# EAGLE board EduBall_V1.1 (EAGLE 7.5.0)

No outline drawn. Coordinates in mm, seen from the top.
Copper layers (1*16): Top 0.035mm / dielectric 1.5mm / Bottom 0.035mm
Design rules "default": minimum track width 10mil, minimum drill 24mil, track to track 8mil, track to pad 8mil, pad to pad 8mil, via to via 8mil, smd to smd 8mil, copper to edge 40mil, drill to drill 8mil, minimum pad ring 10mil, minimum via ring 8mil, stop-mask expansion 4mil, vias tented up to drill 0mil, thermal gap 10mil
Milling: area 0,0 to 50,50

## Footprints (pad centres in the part's own frame; a part is rotated, then mirrored left to right if it is on the bottom)
0805 = smd 0.8 x 1.2: 1 -0.9,0; 2 0.9,0
LED-0805 = smd 0.889 x 1.27: + -0.889,0; - 0.889,0
USB-MINIB = smd 2.5 x 0.5: D+ 2.5,0; D- 2.5,0.8; GND 2.5,-1.6; ID 2.5,-0.8; VBUS 2.5,1.6 | smd 2.5 x 2: MTN1 -3,4.5; MTN2 2.5,4.5; MTN3 -3,-4.5; MTN4 2.5,-4.5 | hole 0.9: 0,2.2; 0,-2.2
JST-2-PTH-VERT = drill 0.7 pad 1.6: 1 -1,-0.55; 2 1,-0.55
2X3-NS = drill 1.016 pad 1.88 square: 1 -2.54,-1.27 | drill 1.016 pad 1.88 octagon: 2 -2.54,1.27; 3 0,-1.27; 4 0,1.27; 5 2.54,-1.27; 6 2.54,1.27
SOT23-5 = smd 0.55 x 1.2: 1 -0.95,-1.3; 2 0,-1.3; 3 0.95,-1.3; 4 0.95,1.3; 5 -0.95,1.3
WS2812B = smd 1.651 x 1: 1 -2.577,1.6; 2 -2.577,-1.6; 3 2.577,-1.6; 4 2.577,1.6
REED_SWITCH_PTH = drill 1.016 pad 1.88: P$1 -8.89,0; P$2 8.89,0
SW2-2.6-3.0X2.5X1.2+0.4MM = smd 1 x 1.7: 1 -1.9,0; 2 1.9,0
LGA-24 = smd 0.7 x 0.29: 1 -1.875,1.25; 2 -1.875,0.75; 3 -1.875,0.25; 4 -1.875,-0.25; 5 -1.875,-0.75; 6 -1.875,-1.25; 13 1.875,-1.25; 14 1.875,-0.75; 15 1.875,-0.25; 16 1.875,0.25; 17 1.875,0.75; 18 1.875,1.25 | smd 0.29 x 0.7: 7 -1.25,-1.875; 8 -0.75,-1.875; 9 -0.25,-1.875; 10 0.25,-1.875; 11 0.75,-1.875; 12 1.25,-1.875; 19 1.25,1.875; 20 0.75,1.875; 21 0.25,1.875; 22 -0.25,1.875; 23 -0.75,1.875; 24 -1.25,1.875
XBEE-SILK = drill 0.8 pad 1.524: 1 -11,20; 2 -11,18; 3 -11,16; 4 -11,14; 5 -11,12; 6 -11,10; 7 -11,8; 8 -11,6; 9 -11,4; 10 -11,2; 11 11,2; 12 11,4; 13 11,6; 14 11,8; 15 11,10; 16 11,12; 17 11,14; 18 11,16; 19 11,18; 20 11,20
TQFP44 = smd 1.5 x 0.5: 1 -5.8,4; 2 -5.8,3.2; 3 -5.8,2.4; 4 -5.8,1.6; 5 -5.8,0.8; 6 -5.8,0; 7 -5.8,-0.8; 8 -5.8,-1.6; 9 -5.8,-2.4; 10 -5.8,-3.2; 11 -5.8,-4; 23 5.8,-4; 24 5.8,-3.2; 25 5.8,-2.4; 26 5.8,-1.6; 27 5.8,-0.8; 28 5.8,0; 29 5.8,0.8; 30 5.8,1.6; 31 5.8,2.4; 32 5.8,3.2; 33 5.8,4 | smd 0.5 x 1.5: 12 -4,-5.8; 13 -3.2,-5.8; 14 -2.4,-5.8; 15 -1.6,-5.8; 16 -0.8,-5.8; 17 0,-5.8; 18 0.8,-5.8; 19 1.6,-5.8; 20 2.4,-5.8; 21 3.2,-5.8; 22 4,-5.8; 34 4,5.8; 35 3.2,5.8; 36 2.4,5.8; 37 1.6,5.8; 38 0.8,5.8; 39 0,5.8; 40 -0.8,5.8; 41 -1.6,5.8; 42 -2.4,5.8; 43 -3.2,5.8; 44 -4,5.8
HC49US = drill 0.7 pad 1.651: 1 -2.54,0; 2 2.54,0

## Placement (x,y rotation side)
C1  4.7uf  [0805]  6.35,19.05 270 bottom
C2  4.7uf  [0805]  8.89,10.16 150 bottom
C3  1uf  [0805]  17.02,24.51 270 bottom
C4  22pf  [0805]  30.35,34.67 90 bottom
C5  22pf  [0805]  20.57,34.67 270 bottom
C6  0.1uf  [0805]  24.26,17.02 180 bottom
C7  4.7uf  [0805]  27.18,13.97 90 bottom
C8  0.1uf  [0805]  25.15,13.97 90 bottom
C9  4.7uf  [0805]  30.48,13.97 90 bottom
C10  0.1uf  [0805]  18.59,4.31 250 top
C11  0.1uf  [0805]  30.93,4.43 295 top
C12  0.1uf  [0805]  45.97,29.97 185 top
C13  0.1uf  [0805]  4.2,30.12 175 top
C14  0.1uf  [0805]  16.73,39.49 325 bottom
C15  0.1uf  [0805]  34.08,39.82 35 bottom
C16  1uf  [0805]  30.1,25.53 270 top
C17  0.22uf  [0805]  26.8,21.08 0 top
C18  4.7uf  [0805]  23.24,21.08 180 top
D7  GREEN-0805  [LED-0805]  11.43,15.24 270 bottom
J1  USB-MINIB-5PIN  [USB-MINIB]  25.4,43.31 270 top
J2  2p-2.0  [JST-2-PTH-VERT]  6.35,13.97 300 top
J3  AVR_SPI_PRG_6NS  [2X3-NS]  43.18,13.97 55 top
MCP  MCP73831  [SOT23-5]  8.89,19.05 0 bottom
PIX1  [WS2812B]  13.29,42.98 32.5 top
PIX2  [WS2812B]  3.81,25.4 85 top
PIX3  [WS2812B]  13.97,6.35 155 top
PIX4  [WS2812B]  35.56,6.35 205 top
PIX5  [WS2812B]  46.48,25.15 275 top
PIX6  [WS2812B]  36.83,43.18 325 top
PIX7  [WS2812B]  36.83,43.18 215 bottom
PIX8  [WS2812B]  46.48,25.15 265 bottom
PIX9  [WS2812B]  35.56,6.35 335 bottom
PIX10  [WS2812B]  13.97,6.35 25 bottom
PIX11  [WS2812B]  3.81,25.42 95 bottom
PIX12  [WS2812B]  13.31,43.01 145 bottom
R1  4.7 k  [0805]  8.89,22.86 180 bottom
R2  330  [0805]  11.43,19.05 270 bottom
R3  47 k  [0805]  17.27,12.7 0 bottom
R4  1k  [0805]  17.27,14.86 0 bottom
R5  1k  [0805]  33.91,24.51 90 bottom
R6  1k  [0805]  33.91,20.45 90 bottom
R7  22  [0805]  18.54,35.56 90 bottom
R8  22  [0805]  16.76,35.56 90 bottom
R9  47k  [0805]  29.59,10.67 0 bottom
R10  47k  [0805]  29.59,16.89 0 bottom
R11  220  [0805]  33.91,28.32 270 bottom
R12  100  [0805]  17.53,32.51 180 bottom
R13  10k  [0805]  11.43,31.37 0 top
R14  4.7k  [0805]  19.43,30.61 90 top
R15  4.7k  [0805]  26.54,30.61 90 top
R16  10k  [0805]  31.37,30.61 90 top
R17  10k  [0805]  24.13,30.61 90 top
R18  10k  [0805]  28.96,30.61 90 top
R19  10k  [0805]  21.72,30.61 90 top
S1  Reed  [REED_SWITCH_PTH]  25.4,10.16 180 top
STMP  STMPS2171  [SOT23-5]  34.29,13.97 90 bottom
SW1  RESET  [SW2-2.6-3.0X2.5X1.2+0.4MM]  10.54,27.56 90 top
TLV  TLV3333P  [SOT23-5]  21.59,13.97 90 bottom
U2  LSM9DS0  [LGA-24]  25.4,25.4 0 top
U$1  XBEE-2B2  [XBEE-SILK]  25.4,16.51 0 top
U$2  ATMEGA32U4TQFP-44  [TQFP44]  25.4,25.4 180 bottom
Y1  8MHz  [HC49US]  25.4,35.56 0 top

## Library data of the parts
C1-C18 R1-R19 = SparkFun-Passives
D7 = Seeed-LED-2016; MPN: 17-215SYGC/S530-E2/TR8
J1 = SparkFun-Connectors; PROD_ID: CONN-08193
J2 J3 = SparkFun-Connectors
MCP = SparkFun-PowerIC; PROD_ID: IC-09995
PIX1-PIX12 = SparkFun-LED; PROD_ID: DIO-12503
S1 = SparkFun-Electromechanical
STMP TLV = Power_Managment
SW1 = Seeed-Switch-2016; MPN: B3U-1000P-2P-SMD
U2 U$2 = SparkFun-DigitalIC
U$1 = SparkFun-RF
Y1 = SparkFun-FreqCtrl

## Nets
3.3V: C7.1 C8.1 C16.1 J3.2 R13.2 R14.2 R15.2 R16.2 R17.2 R18.2 R19.2 TLV.5 U2.15 U2.16 U2.17 U2.18 U$1.1 U$2.14 U$2.24 U$2.34 U$2.44
D1: R12.2 U$2.21
D5: R6.2 U$2.31
D6: R11.2 U$2.27
D8: R5.2 U$2.28
DIN_LED: PIX1.2 R11.1
EN_3.3: R3.2 R4.2 R5.1 S1.P$2
EN_LED: R6.1 STMP.4
GND: C1.2 C2.2 C3.2 C4.1 C5.2 C6.2 C7.2 C8.2 C9.2 C10.1 C11.1 C12.1 C13.1 C14.1 C15.1 C16.2 C18.2 J1.GND J2.1 J3.6 MCP.2 PIX1.3 PIX2.3 PIX3.3 PIX4.3 PIX5.3 PIX6.3 PIX7.3 PIX8.3 PIX9.3 PIX10.3 PIX11.3 PIX12.3 R1.1 R3.1 R10.1 STMP.2 SW1.1 TLV.2 U2.2 U2.3 U2.4 U2.5 U2.6 U$1.10 U$2.5 U$2.15 U$2.23 U$2.33 U$2.35 U$2.43
MISO: J3.1 U$2.11
MOSI: J3.4 U$2.10
N$1: MCP.5 R1.2
N$2: PIX1.4 PIX2.2
N$3: R4.1 TLV.3
N$4: D7.- MCP.1
N$5: D7.+ R2.2
N$6: PIX2.4 PIX3.2
N$7: PIX3.4 PIX4.2
N$8: PIX4.4 PIX5.2
N$9: PIX5.4 PIX6.2
N$10: PIX6.4 PIX7.2
N$11: PIX7.4 PIX8.2
N$12: PIX8.4 PIX9.2
N$13: PIX9.4 PIX10.2
N$14: PIX10.4 PIX11.2
N$15: PIX11.4 PIX12.2
N$16: J1.D+ R7.2
N$17: R7.1 U$2.4
N$18: R8.1 U$2.3
N$19: J1.D- R8.2
N$20: C3.1 U$2.6
N$21: C6.1 U$2.42
N$22: C18.1 U2.7
N$23: C4.2 U$2.17 Y1.2
N$24: C5.1 U$2.16 Y1.1
N$25: R9.2 R10.2 U$2.36
N$26: C17.2 U2.9
N$27: C17.1 U2.8
N$32: R19.1 U2.23
N$33: R18.1 U2.20
N$34: R17.1 U2.22
N$35: R16.1 U2.19
RESET: J3.5 R13.1 SW1.2 U$2.13
RX: U$1.2 U$2.20
SCK: J3.3 U$2.9
SCL: R15.1 U2.21 U$2.18
SDA: R14.1 U2.24 U$2.19
TX: R12.1 U$1.3
VBAT: C2.1 J2.2 MCP.3 S1.P$1 STMP.5 TLV.1
VBUS: C1.1 J1.VBUS MCP.4 R2.1 U$2.2 U$2.7
VIN_LED: C9.1 C10.2 C11.2 C12.2 C13.2 C14.2 C15.2 PIX1.1 PIX2.1 PIX3.1 PIX4.1 PIX5.1 PIX6.1 PIX7.1 PIX8.1 PIX9.1 PIX10.1 PIX11.1 PIX12.1 R9.1 STMP.1

## Tracks (layer width: path | path; a pad name or v marks a point on that pad's centre or on a via)
3.3V  (20 unrouted)
D1  (1 unrouted)
D5  (1 unrouted)
D6  (1 unrouted)
D8  (1 unrouted)
DIN_LED  (1 unrouted)
EN_3.3  (3 unrouted)
EN_LED  (1 unrouted)
GND  (50 unrouted)
MISO  (1 unrouted)
MOSI  (1 unrouted)
N$1  (1 unrouted)
N$2  (1 unrouted)
N$3  (1 unrouted)
N$4  (1 unrouted)
N$5  (1 unrouted)
N$6  (1 unrouted)
N$7  (1 unrouted)
N$8  (1 unrouted)
N$9  (1 unrouted)
N$10  (1 unrouted)
N$11  (1 unrouted)
N$12  (1 unrouted)
N$13  (1 unrouted)
N$14  (1 unrouted)
N$15  (1 unrouted)
N$16  (1 unrouted)
N$17  (1 unrouted)
N$18  (1 unrouted)
N$19  (1 unrouted)
N$20  (1 unrouted)
N$21  (1 unrouted)
N$22  (1 unrouted)
N$23  (2 unrouted)
N$24  (2 unrouted)
N$25  (2 unrouted)
N$26  (1 unrouted)
N$27  (1 unrouted)
N$32  (1 unrouted)
N$33  (1 unrouted)
N$34  (1 unrouted)
N$35  (1 unrouted)
RESET  (3 unrouted)
RX  (1 unrouted)
SCK  (1 unrouted)
SCL  (2 unrouted)
SDA  (2 unrouted)
TX  (1 unrouted)
VBAT  (5 unrouted)
VBUS  (5 unrouted)
VIN_LED  (20 unrouted)